# Altium PCB ADAS_ECU_MB_revA.PcbDoc (part 3 of 6)
Units mm, origin at the board's own origin, x right, y up, seen from the top; angles counter-clockwise.
Board outline 180 x 120 mm, 6 copper layers (Top Layer, Mid Layer 1, Mid Layer 2, Mid Layer 3, Mid Layer 4, Bottom Layer), stack 1.554 mm thick; 648 components, 505 nets, 4389 pads, 80 vias.
Unrouted connection lines stored in the file: 197.
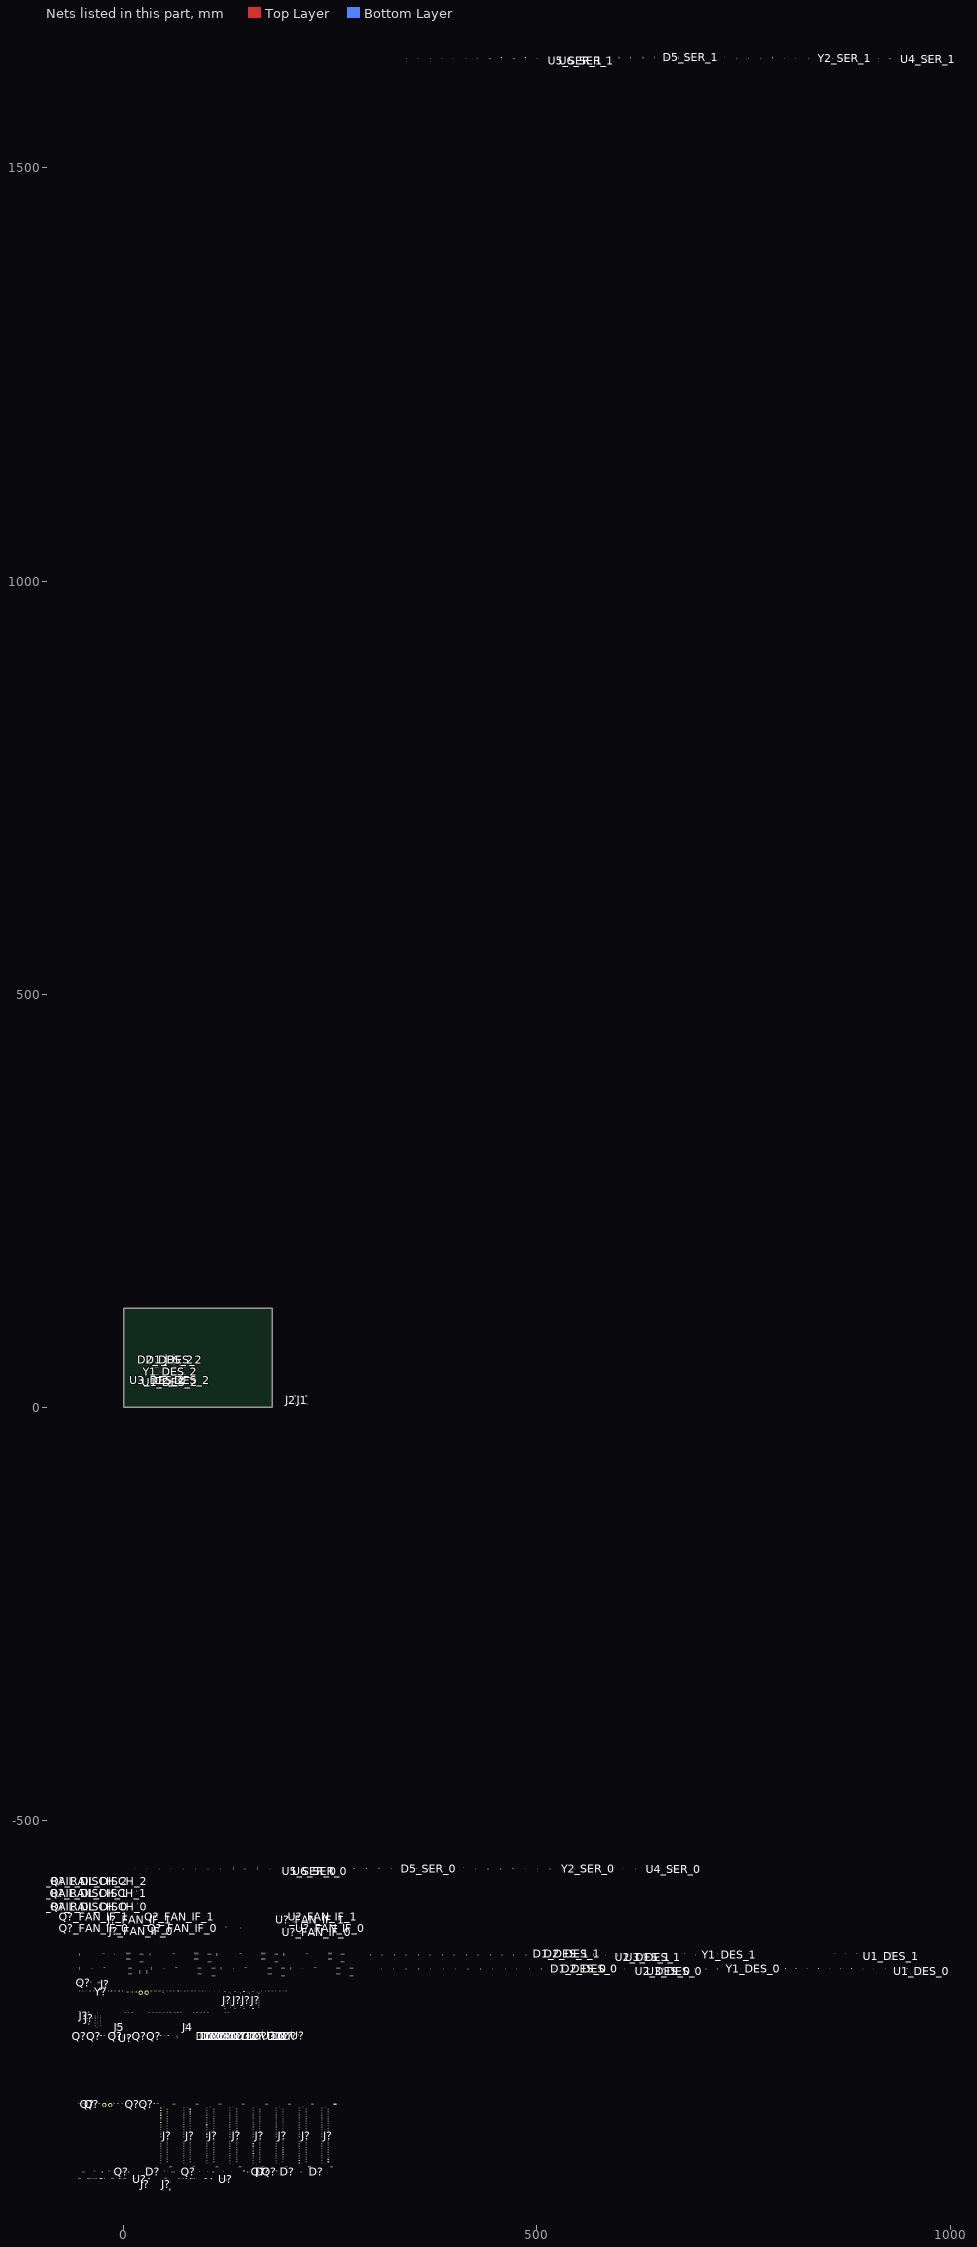
[diagram p3: the nets of this part, all layers, seen from the top]

## Footprints (in the part's own frame and the unit in brackets; to place one, negate y for a bottom-side part, rotate by r counter-clockwise, add the part's x,y. Pads: shape width x height; smd on the part's side, far side on the other; paste and mask are expansions set on the pad) (continued)
RESC1608X55X30LL15T15 [mm] "Chip Resistor, 2-Leads, Body 1.60x0.80mm, IPC High Density"
  rect 0.7x0.85 smd: 1(-0.625,0) 2(0.625,0)
  body extent -0.87,-0.48 0.87,0.48, height 0.55
RESC1608X55X30ML15T15 [mm] "Chip Resistor, 2-Leads, Body 1.60x0.80mm, IPC Low Density"
  rect 0.9x1.05 smd: 1(-0.725,0) 2(0.725,0)
  body extent -0.87,-0.48 0.87,0.48, height 0.55
RESC1609X55X30LL15T15 [mm] "Chip Resistor, 2-Leads, Body 1.75x0.95mm, IPC High Density"
  rect 0.75x0.85 smd: 1(-0.65,0) 2(0.65,0)
  body extent -0.87,-0.48 0.87,0.48, height 0.55
RESC1609X55X30ML15T15 [mm] "Chip Resistor, 2-Leads, Body 1.75x0.95mm, IPC Low Density"
  rect 1.15x1.05 smd: 1(-0.85,0) 2(0.85,0)
  body extent -0.87,-0.48 0.87,0.48, height 0.55
SOT65P242X110-6N [mm] "SOT23, 6-Leads, Body 1.70x2.42mm, Pitch 0.65mm, IPC Medium Density"
  rect 0.8x0.5 smd: 1(-1.125,0.65) 2(-1.125,0) 3(-1.125,-0.65) 4(1.125,-0.65) 5(1.125,0) 6(1.125,0.65)
  silkscreen extent -1.25,-0.9 0.2,1.62, body extent -0.6,-0.87 0.6,0.88, height 1.1
SOT-223_M [mm] "SOT223, 4-Leads, Body 6.5x3.5mm, Pitch 2.3mm, Lead Span 7mm, IPC Low Density"
  rect 2.7x1 smd: 1(-2.95,2.3) 2(-2.95,0) 3(-2.95,-2.3)
  rect 2.7x3.3 smd: 4(2.95,0)
  silkscreen extent -3.07,-3.35 1.3,3.47, body extent -1.85,-3.35 1.85,3.35, height 1.8
SWIT-35RASMT4BHNTRX_V [mm] "Jack, 5-Leads, Body 17x6mm"
  rect 2.2x2.1 smd: 1(-6.3,-4.05) 2(-4.4,4.05)
  rect 2.7x2.1 smd: 3(3,-4.05)
  rect 2x2.1 smd: 4(-7.1,4.05)
  rect 2.6x2.7 smd: 5(7.1,0.75)
  rect 0x0 hole 1.6 unplated: MH(-5.2,0) MH(1.8,0)
  silkscreen extent -8.7,-5.78 5.8,3, body extent -11.2,-3 5.8,3, height 5
TO-252_L [mm] "D-PAK, 4-Leads, Body 6.1x6.5mm, Pitch 2.28mm, Lead Span 9.7mm, IPC High Density"
  rect 1.8x0.9 smd: 1(-4.2,2.28) 3(-4.2,-2.28)
  rect 6.2x5.45 smd: 4(2,0)
  silkscreen extent -4.32,-3.3 -1.5,3.4, body extent -2.05,-3.3 4.15,3.3, height 2.4
WE-TPC_1038 [mm] "Power Inductor, SMD, 2-Leads, body 10x10mm"
  rect 4.6x1.8 smd: 1(0,4.5) 2(0,-4.5)
  silkscreen extent -5,-4.5 5,6.02, body extent -5,-5 5,5, height 3.8
WL-SBCD_0606 [mm] "SMT Bi-color Chip LED Diffuesed, body 1.5x1.6mm"
  rect 0.5x0.8 smd: 1(-0.45,0.8) 2(-0.45,-0.8) 3(0.45,-0.8) 4(0.45,0.8)
  silkscreen extent -0.07,1.48 0.08,1.62, body extent -0.75,-0.8 0.75,0.8, height 0.55

## Part data
C1_DES_0 C1_DES_1 C1_DES_2 C2_DES_0 C2_DES_1 C2_DES_2 C3_DES_0 C3_DES_1 C3_DES_2 C4_DES_0 C4_DES_1 C4_DES_2 C5_DES_0 C5_DES_1 C5_DES_2 C6_DES_0 C6_DES_1 C6_DES_2 C7_DES_0 C7_DES_1 C7_DES_2 C8_DES_0 C8_DES_1 C8_DES_2 C9_DES_0 C9_DES_1 C9_DES_2 C10_DES_0 C10_DES_1 C10_DES_2 C11_DES_0 C11_DES_1 C11_DES_2 C13_DES_0 C13_DES_1 C13_DES_2 C15_DES_0 C15_DES_1 C15_DES_2 C16_DES_0 C16_DES_1 C16_DES_2 C17_DES_0 C17_DES_1 C17_DES_2 C18_DES_0 C18_DES_1 C18_DES_2 C19_DES_0 C19_DES_1 C19_DES_2 C20_DES_0 C20_DES_1 C20_DES_2 C21_DES_0 C21_DES_1 C21_DES_2 C22_DES_0 C22_DES_1 C22_DES_2 C23_DES_0 C23_DES_1 C23_DES_2 C24_DES_0 C24_DES_1 C24_DES_2 C25_DES_0 C25_DES_1 C25_DES_2 C26_DES_0 C26_DES_1 C26_DES_2 C27_DES_0 C27_DES_1 C27_DES_2 C28_DES_0 C28_DES_1 C28_DES_2 C29_DES_0 C29_DES_1 C29_DES_2 C30_DES_0 C30_DES_1 C30_DES_2 C35_SER_0 C35_SER_1 C36_SER_0 C36_SER_1 C37_SER_0 C37_SER_1 C38_SER_0 C38_SER_1 C39_SER_0 C39_SER_1 C40_SER_0 C40_SER_1 C41_SER_0 C41_SER_1 C42_SER_0 C42_SER_1 C43_SER_0 C43_SER_1 C44_SER_0 C44_SER_1 C45_SER_0 C45_SER_1 C46_SER_0 C46_SER_1 C47_SER_0 C47_SER_1 C48_SER_0 C48_SER_1 C49_SER_0 C49_SER_1 C51_SER_0 C51_SER_1 C53_SER_0 C53_SER_1 C54_SER_0 C54_SER_1 C55_SER_0 C55_SER_1 C56_SER_0 C56_SER_1 C57_SER_0 C57_SER_1 C58_SER_0 C58_SER_1 C59_SER_0 C59_SER_1 C60_SER_0 C60_SER_1 C61_SER_0 C61_SER_1 C? C? C? C? C? C? C? C? C? C? C? C? C? C? C? C? C? C? C? C? C? C?: library part CMP-001-00058-1, "LARGE PADS, 0402 CAP, CHANGE COMMENT TO MATCH REAL P/N", Capacitor Type=Ceramic, Case/Package=0402, Max Operating Temperature=85°C, Min Operating Temperature=-55°C, Mounting Technology="Surface Mount", Pins=2, RoHS Compliant=Yes
C12_DES_0 C12_DES_1 C12_DES_2 C14_DES_0 C14_DES_1 C14_DES_2 C50_SER_0 C50_SER_1 C52_SER_0 C52_SER_1 C? C? C? C? C? C?: library part CMP-2006-02792-2, "Chip Multilayer Ceramic Capacitors for General Purpose, 0603, 10uF, X5R, 15%, 20%, 6.3V", Capacitance=10uF, Case Code (Imperial)=0603, Case Code (Metric)=1608, Dielectric=X5R, Max Operating Temperature=85°C, Min Operating Temperature=-55°C, Package Quantity=4000, Tolerance=20%, Voltage=6.3V, Case/Package=0603, Depth=0.8mm, Height=0.8mm, Lead Free="Lead Free", Length=1.6mm, Material=Ceramic, Mount="Surface Mount", Packaging="Tape and Reel", Radiation Hardening=No, REACH SVHC="No SVHC", Termination=SMD/SMT, Thickness=0.035inch, Voltage Rating=6.3V, Voltage Rating (DC)=6.3V, Width=0.031inch
C31_DES_0 C31_DES_1 C31_DES_2 C32_DES_0 C32_DES_1 C32_DES_2 C33_DES_0 C33_DES_1 C33_DES_2 C34_DES_0 C34_DES_1 C34_DES_2: library part CMP-2007-03222-3, "Chip Multilayer Ceramic Capacitors for General Purpose, 0805, 22uF, X5R, 15%, 20%, 25V", Capacitance=22uF, Case Code (Imperial)=0805, Case Code (Metric)=2012, Dielectric=X5R, Max Operating Temperature=85°C, Min Operating Temperature=-55°C, Package Quantity=3000, Resistor Type=Ceramic, Tolerance=20%, Voltage=25V, Case/Package=0805, Depth=1.25mm, Height=1.25mm, Lead Free="Lead Free", Length=2mm, Material=Ceramic, Mount="Surface Mount", Packaging="Tape and Reel", REACH SVHC="No SVHC", Termination=SMD/SMT, Thickness=0.057inch, Voltage Rating=25V, Voltage Rating (DC)=25V, Weight=0.000335oz, Width=1.25mm
C? C? C? C? C? C? C? C? C? C? C? C? C? C? C? C? C? C? C? C? C? C? C? C? C?_FAN_IF_0 C?_FAN_IF_0 C?_FAN_IF_1 C?_FAN_IF_1: library part CMP-2000-05393-2, "Multilayer Ceramic Capacitors 100nF ±10% 50V X7R SMD 0402", Capacitance=100nF, Case Code (Imperial)=0402, Case Code (Metric)=1005, Dielectric=X7R, Dielectric Material=Ceramic, Max Operating Temperature=125°C, Min Operating Temperature=-55°C, Package Quantity=1, Tolerance=10%, Voltage=50V, Case/Package=0402, Construction=Flat, Depth=0.5mm, Height=0.5mm, Lead Free="Lead Free", Length=1mm, Mount="Surface Mount", Packaging="Tape and Reel", Radiation Hardening=No, REACH SVHC="No SVHC", Resistor Type=Ceramic, RoHS Compliant=Yes, Series=C, Termination=SMD/SMT, Thickness=0.022inch, Voltage Rating=50V, Voltage Rating (DC)=50V, Weight=2.3E-05oz, Width=0.02inch
C? C?: library part CMP-2008-03310-2, "CAP CER 4.7PF 50V NP0 0402", Capacitance="4.7 pF", Manufacturer=Kemet, Package=C0402-BB, Temperature="-55°C to +125°C", Temperature Characteristic=C0G, Temperature Coefficient=15%, Temperature Range High=+125°C, Temperature Range Low=-55°C, Tolerance="0.25 pF", Voltage Rating="50 V", Automotive=No, Category=Cap, ComponentLink2Description=Datasheet, ComponentLink2URL=https://content.kemet.com/datasheets/KEM_C1002_X7R_SMD.pdf, Device Class L1="Passive Components", Device Class L2=Capacitors, Device Class L3="Ceramic Capacitors", Digikey Description="CAP CER 4.7PF 50V NP0 0402", Height=0.55mm, Ipc Land Pattern Name=CAPC10050X50, Lead Free=Yes, Manufacturer Part Number=C0402C479C5GACTU, Material=Ceramic, Mouser Description="Multilayer Ceramic Capacitors MLCC - SMD/SMT 50volts 4.7pF C0G .25pF", Octopart=https://octopart.com/c0402c479c5gactu-kemet-9144199, RoHS=TRUE
C?: library part CMP-2008-03945-2, "CAP CER 12PF 50V C0G/NP0 0402", Capacitance=12pF, Case Code (Imperial)=0402, Case Code (Metric)=1005, Dielectric=C0G, Max Operating Temperature=125°C, Min Operating Temperature=-55°C, Package Quantity=10000, Tolerance=2%, Voltage=50V, Case/Package=0402, Construction=Flat, Depth=0.5mm, Height=0.5mm, Lead Free="Lead Free", Length=1mm, Material=Ceramic, Mount="Surface Mount", Packaging="Tape and Reel", Radiation Hardening=No, REACH SVHC="No SVHC", Series=GRM, Termination=SMD/SMT, Thickness=0.022inch, Voltage Rating=50V, Voltage Rating (DC)=50V, Width=0.5mm
C? C? C? C?: library part CMP-2007-00321-1, Manufacturer=Kemet, Part Number=C0805C221K5RACTU
C? C? C? C?: library part CMP-13271-000002-1, "CAP CER 10UF 10V X5R 0402", Capacitance=10uF, Manufacturer=Samsung, Temperature="-55°C to +85°C", Temperature Characteristic=X5R, Temperature Coefficient=15%, Temperature Range High=+85°C, Temperature Range Low=-55°C, Tolerance=20%, Voltage Rating=10V, Automotive=No, Category=Cap, ComponentLink2Description=Datasheet, ComponentLink2URL=http://www.samsungsem.com/kr/support/product-search/mlcc/__icsFiles/afieldfile/2019/05/10/19-CL05A106MP5NUNC.pdf, Device Class L1="Passive Components", Device Class L2=Capacitors, Device Class L3="Ceramic Capacitors", Digikey Description="CAP CER 10UF 10V X5R 0402", Height=0.7mm, Ipc Land Pattern Name=CAPC10050X50, Lead Free=Yes, Manufacturer Part Number=CL05A106MP5NUNC, Material=Ceramic, Octopart=https://octopart.com/cl05a106mp5nunc-samsung-22457395, Package=CL05A106MP5NUNC, RoHS=TRUE
C? C?: library part CMP-2008-03137-2, Manufacturer=Kemet, Part Number=C0402C221K5RAC7867
C? C? C? C? C? C? C? C? C? C?: library part CMP-08246-006072-1, "Multilayer Ceramic Capacitors 220nF ±10% 10V X7R SMD 0402", Capacitance=220nF, Case Code (Imperial)=0402, Case Code (Metric)=1005, Dielectric=X7R, Dielectric Material=Ceramic, Max Operating Temperature=125°C, Min Operating Temperature=-55°C, Package Quantity=10000, Tolerance=10%, Voltage Rating=10V, Case/Package=0402, Construction=Flat, Depth=0.5mm, Height=0.5mm, Lead Free="Lead Free", Length=1mm, Mount="Surface Mount", Packaging="Tape and Reel", Radiation Hardening=No, REACH SVHC="No SVHC", Resistor Type=Ceramic, RoHS Compliant=Yes, Series=C, Termination=SMD/SMT, Thickness=0.022inch, Voltage Rating (DC)=10V, Weight=2.3E-05oz, Width=0.02inch
C?: library part CMP-1664-00002-2, "Tantalum Capacitor, 330 uF, +/- 20%, 2.5 V, -55 to 105 degC, 2-Pin Molded, RoHS, Tape and Reel", Capacitance="330 uF", Case/Package=1411, Max Operating Temperature="105 degC", Min Operating Temperature="-55 degC", Package Quantity=2000, ComponentLink1Description="Manufacturer URL", ComponentLink1URL=http://www.kemet.com/, ComponentLink2Description=Datasheet, ComponentLink2URL=http://capacitoredge.kemet.com/capedge2/DataSheet?pn=T520B337M2R5ATE045, DatasheetVersion=07/2016, Height="2.1 mm", Length="3.5 mm", Mount="Surface Mount", Mounting Technology="Surface Mount", PackageDescription="2-Pin Surface Mount Device, Body 3.5 x 2.8 mm", Packaging="Tape and Reel", PartNumber=T520B337M2R5ATE045, Radiation Hardening=No, RoHSCompliant=True, Width="2.8 mm"
D1_DES_0 D1_DES_1 D1_DES_2 D2_DES_0 D2_DES_1 D2_DES_2 D5_SER_0 D5_SER_1 D? D? D? D? D? D? D? D?: library part CMP-04989-000002-1, "4-CHANNEL LOW-CAPACITANCE SURGE", Ambient Temperature Range High=+125°C, Ambient Temperature Range Low=-40°C, Breakdown Voltage=5.5V, Capacitance=0.55pF, Clamping Voltage=11.5V, Manufacturer="Texas Instruments", Package=DQA0010A, Peak Pulse Current=5.5A, Peak Pulse Power=50W, Reverse Standoff Voltage=3.6V, Temperature="-40°C to +125°C", Automotive=No, Category=Diode, ComponentLink2Description=Datasheet, ComponentLink2URL=http://www.ti.com/lit/ds/symlink/esd204.pdf, Device Class L1="Circuit Protection", Device Class L2="TVS Diodes", Device Class L3=unset, Digikey Description="4-CHANNEL LOW-CAPACITANCE SURGE", Direction=Bidirectional, Height=0.55mm, Lead Free=Yes, Manufacturer Part Number=ESD204DQAR, Mouser Description="4-Channel Low-Capacitance Surge and ESD Protection Diode 10-USON -40 to 125", Number Of Channels=4, Octopart=https://octopart.com/esd204dqar-texas+instruments-89917476, RoHS=TRUE, Standoff Height=0mm, Temperature Range High=+125°C, Temperature Range Low=-40°C
D? D? D? D? D? D? D? D? D? D? D? D? D? D? D? D?: library part CMP-04989-000002-1, "4-CHANNEL LOW-CAPACITANCE SURGE", Ambient Temperature Range High=+125°C, Ambient Temperature Range Low=-40°C, Breakdown Voltage=5.5V, Capacitance=0.55pF, Clamping Voltage=11.5V, Manufacturer="Texas Instruments", Manufacturer Part Number=ESD204DQAR, Package=DQA0010A, Peak Pulse Current=5.5A, Peak Pulse Power=50W, Reverse Standoff Voltage=3.6V, Temperature="-40°C to +125°C", Automotive=No, Category=Diode, ComponentLink2Description=Datasheet, ComponentLink2URL=http://www.ti.com/lit/ds/symlink/esd204.pdf, Device Class L1="Circuit Protection", Device Class L2="TVS Diodes", Device Class L3=unset, Digikey Description="4-CHANNEL LOW-CAPACITANCE SURGE", Direction=Bidirectional, Height=0.55mm, Lead Free=Yes, Mouser Description="4-Channel Low-Capacitance Surge and ESD Protection Diode 10-USON -40 to 125", Number Of Channels=4, Octopart=https://octopart.com/esd204dqar-texas+instruments-89917476, RoHS=TRUE, Standoff Height=0mm, Temperature Range High=+125°C, Temperature Range Low=-40°C
D?: library part CMP-1055-00557-1, "Dual Series Cathode Schottky Barrier Diodes, 3-Pin SOT-323, Pb-Free, Tape and Reel", Manufacturer="On Semiconductor", ComponentLink1Description="Manufacturer URL", ComponentLink1URL=http://www.onsemi.com/, ComponentLink2Description=Datasheet, ComponentLink2URL=http://www.onsemi.cn/pub_link/Collateral/BAT54CWT1-D.PDF, ComponentLink3Description="Package Specification", ComponentLink3URL=http://www.onsemi.com/pub_link/Collateral/419-04.PDF, Configuration="Common Cathode", DatasheetVersion="Rev. 7", IFSM Max (A)=0.6, Mounting Technology="Surface Mount", PackageDescription="3-Pin Small Outline Transistor, Body 2 x 1.25 mm, Pitch 0.65 mm", PackageReference=SOT-323-3-419-04, PackageVersion="Rev. N, 11/2008", Packing="Tape and Reel", PartNumber=BAT54CWT1G, RoHS=TRUE, trr Max (ns)=5
D?: library part CMP-004-00040-2, "Led, Red/Grn, 180Mcd/230Mcd, 624Nm/525Nm Rohs Compliant: Yes", Component Type=Standard, Design Item ID=CMP-004-00034-2, Pins=4, Source=rgled.SchLib
F1_DES_0 F1_DES_1 F1_DES_2 F2_DES_0 F2_DES_1 F2_DES_2 F3_DES_0 F3_DES_1 F3_DES_2 F4_DES_0 F4_DES_1 F4_DES_2 F?_FAN_IF_0 F?_FAN_IF_1: library part CMP-08606-000071-1, "PTC RESET FUSE 60V 500MA 2920", Case Code (Imperial)=2920, Case Code (Metric)=7351, Current Rating=10A, Hold Current=500mA, Max Operating Temperature=85°C, Max Voltage Rating (DC)=60V, Min Operating Temperature=-40°C, Package Quantity=1500, Power Dissipation=1.5W, Resistance=1.4R, Trip Current=1A, Approvals=cULus, Case/Package=2920, Height=1.25mm, Lead Free="Lead Free", Length=7.98mm, Max Current Rating=10A, Operating Supply Voltage=60V, Packaging="Tape and Reel", REACH SVHC="No SVHC", RoHS Compliant=Yes, Series=2920L, Terminal Material=Copper, Termination=SMD/SMT, Time to Trip=4s, Voltage Rating=60V, Voltage Rating (DC)=60V, Width=5.44mm, Working Voltage=60V
FB? FB? FB? FB? FB? FB? FB? FB?: library part CMP-0686-00252-4, "Chip Ferrite Bead, 0402, 600Ω @ 100MHz, 0.23Ω, 25%, 900mA", Case Code (Imperial)=0402, Case Code (Metric)=1005, Current Rating=900mA, DC Resistance (DCR)=230mR, Max Operating Temperature=125°C, Min Operating Temperature=-55°C, Package Quantity=10000, Test Frequency=100MHz, Tolerance=25%, Case/Package=0402, Height=0.5mm, Impedance=600R, Lead Free="Lead Free", Length=1mm, Material=Steel, Max Current Rating=900mA, Max DC Current=900mA, Number of Circuits=1, Number of Lines=1, Number of Pins=2, Packaging="Tape and Reel", Termination=SMD/SMT, Width=0.5mm
J1 J2 J3: library part CMP-002-00085-1, "Connector Mini-FAKRA Plug 0Hz to 9GHz 50Ohm Solder Straight Through Hole Gold"
J4 J5: library part CMP-002-00054-1, "RF F Connector, Male, Board Mount, Solder Terminal, Plug", Connector Type="RF F CONNECTOR", Mounting Technology=Board, RoHS Compliant=Yes
J? J? J? J? J? J? J? J?: library part CMP-03356-000001-1, "DDR4 SODIMM 260P 9.2H STD", Current Rating=0.5A, Manufacturer="TE Connectivity", Package=0, Temperature="-55°C to +85°C", Temperature Range High=+85°C, Temperature Range Low=-55°C, Voltage Rating=25V, Automotive=No, Category=Conn, ComponentLink2Description=Datasheet, ComponentLink2URL=https://www.te.com/commerce/DocumentDelivery/DDEController?Action=showdoc&DocId=Specification+Or+Standard%7F108-115122%7FA1%7Fpdf%7FEnglish%7FENG_SS_108-115122_A1.pdf%7F2309413-1, Conn Orientation=Horizontal, Contact Material=Gold,Nickel, Device Class L1=Connectors, Device Class L2="Memory Connectors", Device Class L3=unset, Digikey Description="DDR4 SODIMM 260P 9.2H STD", Footprint Url=https://www.te.com/commerce/DocumentDelivery/DDEController?Action=showdoc&DocId=Customer+Drawing%7F2309413%7F4%7Fpdf%7FEnglish%7FENG_CD_2309413_4.pdf%7F2309413-1, Height=18.8mm, Is Female=yes, Lead Free=Yes, Manufacturer Part Number=2309413-1, Memory Type=SDRAM,DDR, Mouser Description="Conn DDR4 DIMM Socket SKT 260 POS 0.5mm Solder RA SMD T/R", Number of Contacts=260, Octopart=https://octopart.com/2309413-1-te+connectivity-84799194, Pitch=0.5mm, RoHS=TRUE
J?: library part CMP-02766-001428-1, "CONN HEADER VERT 2POS 2.54MM", Color=Black, Current Rating=7.6A, Max Operating Temperature=125°C, Max Voltage Rating (AC)=550V, Min Operating Temperature=-55°C, Package Quantity=1, Connector Type="Male Pin", Contact Material=Bronze, Contact Mating Length=0.23inch, Contact Plating=Gold, Contact Type="Male Pin", Depth=2.54mm, Gender=Male, Housing Color=Black, Housing Material=Polyester, Lead Free="Lead Free", Length=5.08mm, Max Current Rating=7.6A, Mount="Through Hole", Number of Contacts=2, Number of Positions=2, Number of Rows=1, Orientation=Straight, Packaging=Bulk, Pitch=2.54mm, Radiation Hardening=No, REACH SVHC="No SVHC", RoHS Compliant=Yes, Series=TSW, Termination=Solder, Voltage Rating=550V, Width=2.54mm
J?: library part CMP-1772-00001-1, "Female 3.5 mm Phone Jack, 5 Position, Height 5 mm, RoHS, Tape and Reel", Current Rating="50 mA", Package Quantity=3000, Voltage Rating (DC)="12 V", ComponentLink1Description="Manufacturer URL", ComponentLink1URL=http://www.switchcraft.com/, ComponentLink2Description=Datasheet, ComponentLink2URL=http://www.switchcraft.com/Drawings/35rasmt4bhntrx_cd.pdf, Contact Material=Silver, Contact Plating=Silver, DatasheetVersion="Rev. C, 07/2014", Mount="Through Hole", PackageDescription="Female 3.5 mm Phone Jack, 5 Position, Height 5 mm", PackageReference=35RASMT4BHNTRX, Packaging="Tape and Reel", RoHSCompliant=true
J?: library part CMP-17439-000359-1, "CONN HEADER VERT 7POS 2MM", Color=Natural, Contact Resistance=10mR, Current Rating=2A, Insulation Resistance=1GR, Package Quantity=500, Test Voltage=800V, Connector Type="Male Pin", Contact Material=Bronze, Contact Mating Length=0.13inch, Contact Plating=Tin, Contact Type="Male Pin", Fastening Type=Detent, Gender=Male, Housing Color=Natural, Housing Material=Nylon, Lead Free="Contains Lead", Mount="Through Hole", Number of Contacts=7, Number of Positions=7, Number of Rows=1, Orientation=Vertical, Packaging=Bulk, Pitch=0.079inch, Series=PH, Termination=Press-Fit
J? J? J? J?: library part CMP-03365-000001-1, "CONN EDGE DUAL FMALE 67POS 0.020", Current Rating=0.5A, Manufacturer=TE, Temperature="-40°C to +80°C", Temperature Range High=+80°C, Temperature Range Low=-40°C, Voltage Rating=50V, Automotive=No, Category=Conn, ComponentLink2Description=Datasheet, ComponentLink2URL=http://www.te.com/commerce/DocumentDelivery/DDEController?Action=showdoc&DocId=Specification+Or+Standard%7F114-115006%7FB%7Fpdf%7FEnglish%7FENG_SS_114-115006_B_114-115006_REV_B.pdf%7F1-2199230-6, Conn Gender=Female, Conn Orientation="Right Angle", Contact Material=Gold,Tin, Device Class L1=Connectors, Device Class L2="Card Edge Connectors", Device Class L3=unset, Digikey Description="CONN EDGE DUAL FMALE 67POS 0.020", Footprint Url=http://www.te.com/commerce/DocumentDelivery/DDEController?Action=showdoc&DocId=Customer+Drawing%7F2199230%7FB2%7Fpdf%7FEnglish%7FENG_CD_2199230_B2.pdf%7F1-2199230-6, Height=4.2mm, Is Female=yes, Lead Free=Yes, Manufacturer Part Number=1-2199230-6, Number of Contacts=67, Number of Rows=2, Octopart=https://octopart.com/1-2199230-6-te+connectivity-34969376, Package=1-2199230-6, Pitch=0.5mm, RoHS=TRUE
J?: library part CMP-2000-05829-1, "Micro-USB B Receptacle, Vertical, -30 to 85 degC, 5-Pin SMD, RoHS, Tape and Reel", Color=Black, Current Rating=1.8A, Flammability Rating=UL94V-0, Manufacturer=Molex, Package Description="5-Pin Surface Mount Device, Pitch 0.65 mm", Package Version="Rev. C, 11/2015", Voltage - Max=30V, Voltage Rating=30VAC, Brand=Molex, Connector Type=MicroUSBTypeBReceptacle, Contact Material=CopperAlloy, Contact Plating=Gold, Datasheet URL=http://www.molex.com/webdocs/datasheets/pdf/en-us/1051330001_IO_CONNECTORS.pdf, Datasheet Version=03/2016, Factory Pack Quantity=6000, Gender=Receptacle, Manufacturer URL=http://www.molex.com/, Mounting Angle=Vertical, Mounting Style=SMD/SMT, Mounting Technology=SurfaceMount, Number of Ports=1, Package Reference=105133-0001, Package URL=http://www.molex.com/pdm_docs/sd/1051330001_sd.pdf, Packaging=Reel, PartNumber=105133-0001, Product=MicroUSBTypeBConnectors, Product Category=USBConnectors, RoHS=Details, Series=105133, Standard=USB, Termination Style=SolderTail
J?: library part CMP-02766-001776-1, "CONN HEADER VERT 4POS 2.54MM", Contact Material=Bronze, Contact Plating=Gold, Gender=Male, Mount="Through Hole", Number of Contacts=4, Number of Rows=1, Packaging=Bulk, Pitch=2.54mm, Radiation Hardening=No, Reach SVHC Compliant=Yes, RoHS Compliant=Yes, Series=HTSW, Termination="Through Hole"
J?: library part CMP-04768-000010-1, "HDMI REC.VERTICAL SMT TYPE W/HEI", RoHS Compliant=Yes
J?: library part CMP-002-00077-1, "Board Stacking Connector", Connector Type="BOARD STACKING CONNECTOR", RoHS Compliant=Yes
J?_FAN_IF_0 J?_FAN_IF_1: library part CMP-04776-000290-2, "CONN HEADER VERT 4POS 2.54MM", Ambient Temperature Range High=105°C, Current Rating=500mA, Housing Color=Beige, Manufacturer Lifecycle Status=ACTIVE, Max Operating Temperature=75°C, Min Operating Temperature=0°C, Voltage Rating=250V, Contact Material="Brass, Copper", Contact Plating=Tin, Country of Origin=HK, Depth=5.84mm, Gender=Male, Glow Wire Compliant=Non-compliant, Halogen Free="Low Halogen", Height=7.7mm, Housing Material=Nylon, Lead Pitch=2.54mm, Length=10.2mm, Lifecycle Status=Production, Mount="Through Hole", NexarPartId=854935, Number of Circuits=4, Number of Contacts=4, Number of Pins=4, Number of Positions=4, Number of Rows=1, Orientation=Vertical, Packaging=Bulk, Pitch=2.54mm, Plating=Copper, Radiation Hardening=No, REACH SVHC=Unknown, RoHS=Compliant, Schedule B="8536694040, 8536694040", Termination="Through Hole", Voltage Rating (DC)=250V
L1_DES_0 L1_DES_1 L1_DES_2 L4_DES_0 L4_DES_1 L4_DES_2 L7_DES_0 L7_DES_1 L7_DES_2 L10_DES_0 L10_DES_1 L10_DES_2: library part CMP-0227-00094-3, Ambient Temperature Range High=95°C, Ambient Temperature Range Low=-40°C, Case/Package=Nonstandard, Current Rating=1.2A, DC Resistance (DCR)=255mΩ, Inductance=100µH, Inductance Tolerance=30%, Max Operating Temperature=125°C, Self Resonant Frequency=6MHz, Test Frequency=100kHz, Composition=Wirewound, Core Material=Ferrite, Depth=10mm, Height=3.8mm, Height - Seated (Max)=4.0894mm, Length=10mm, Max DC Current=1.2A, Min Operating Temperature=-40°C, Mount="Surface Mount", NexarPartId=8917123, Number of Pins=2, Packaging="Cut Tape (CT)", REACH SVHC=Unknown, Resistance=255mΩ, RMS Current (Irms)=1.2A, RoHS=Compliant, Saturation Current=1.2A, Shielding=Shielded, Termination=SMD/SMT, Tolerance=30%, Weight=1.273007g, Width=10mm
L2_DES_0 L2_DES_1 L2_DES_2 L5_DES_0 L5_DES_1 L5_DES_2 L8_DES_0 L8_DES_1 L8_DES_2 L11_DES_0 L11_DES_1 L11_DES_2: library part CMP-11268-000041-1, "NOT COILCRAFT - ACTUAL P# --> ADL32VHC-220M /  - Power Injection Chokes for PoC", Ambient Temperature Range High=+125°C, Ambient Temperature Range Low=-40°C, Inductance=22uH, Manufacturer=coilcraft, Manufacturer Part Number=1210POC-223MRC, Package=1210POC, Rms Current=700mA, Saturation Current=720mA, Self Resonant Frequency=70MHz, Series Resistance=0.88Ω, Test Frequency=100kHz, Tolerance=20%, Automotive=Yes, Automotive Grade="Grade 1", Category=Ind, ComponentLink2Description=Datasheet, ComponentLink2URL=https://drive.google.com/open?id=15FlOq8Y4YbRFohfA_cJ40jgnqs8va2Mh, Core Material=Ferrite, Device Class L1="Passive Components", Device Class L2=Inductors, Device Class L3="Fixed Inductors", Height=3mm, Lead Free=Yes, Octopart=https://octopart.com/1210poc-223mrc-coilcraft-103207315, RoHS=TRUE
L3_DES_0 L3_DES_1 L3_DES_2 L6_DES_0 L6_DES_1 L6_DES_2 L9_DES_0 L9_DES_1 L9_DES_2 L12_DES_0 L12_DES_1 L12_DES_2: library part CMP-11268-000007-1, "Fixed Inductors PFL1609 Low Profile 0.56 uH 20 % 1.4 A", Ambient Temperature Range High=+105°C, Ambient Temperature Range Low=-40°C, Inductance=0.56uH, Manufacturer=coilcraft, Package=PFL1609, Rms Current=1100mA, Saturation Current=710mA, Self Resonant Frequency=600MHz, Series Resistance=130mΩ, Test Frequency=7.9MHz, Tolerance=20%, Automotive=Yes, Automotive Grade="Grade 1", Category=Ind, ComponentLink2Description=Datasheet, ComponentLink2URL=https://www.coilcraft.com/pdfs/pfl1609.pdf, Composition=Wirewound, Core Material=Composite, Device Class L1="Passive Components", Device Class L2=Inductors, Device Class L3="Fixed Inductors", Height=0.95mm, Lead Free=Yes, Manufacturer Part Number=PFL1609-561MEW, Mouser Description="Fixed Inductors PFL1609 Low Profile 0.56 uH 20 % 1.4 A", Octopart=https://octopart.com/pfl1609-561mew-coilcraft-20329171, RoHS=TRUE, Shielding=true
MP? MP? MP? MP?: library part CMP-03913-59774857-1, "9774025243R Spacer Material: Steel, Tin-Plated Mounting: SMT Series: WA-SMST Thread D: M2", Max Operating Temperature=150°C, Min Operating Temperature=-55°C, Height=2.5mm, Length=2.5mm, Material=Steel, NexarPartId=59774857, Outside Diameter=4.3434mm, Packaging="Tape and Reel", Plating=Tin, REACH SVHC=Unknown, RoHS=Compliant, Threaded/Unthreaded=Threaded
Q? Q? Q? Q? Q? Q? Q? Q? Q? Q? Q? Q? Q? Q?_FAN_IF_0 Q?_FAN_IF_0 Q?_FAN_IF_1 Q?_FAN_IF_1: library part CMP-2000-05968-1, "N-Channel Enhancement Mode Mosfet, 50 V, 200 mA, -55 to 150 degC, 6-Pin SOT-323, RoHS, Tape and Reel", Id - Continuous Drain Current=200mA, Manufacturer=DiodesIncorporated, Maximum Operating Temperature=+150C, Minimum Operating Temperature=-55C, Package / Case=SOT-323-3, Package Description="3-Pin Small Outline Transistor, Body 2 x 1.25 mm, Pitch 0.65 mm", Package Reference=SOT323, Pd - Power Dissipation=200mW, Rds On - Drain-Source Resistance=1.4Ohms, Vds - Drain-Source Breakdown Voltage=75V, Vgs - Gate-Source Voltage=20V, Brand=DiodesIncorporated, Channel Mode=Enhancement, Configuration=Single, Datasheet URL=http://www.diodes.com/_files/datasheets/ds30206.pdf, Datasheet Version="Rev. 11-2, 09/2013", Factory Pack Quantity=3000, Forward Transconductance - Min=0.1S, Height=1mm, Length=2.2mm, Manufacturer URL=http://www.diodes.com/, Mounting Style=SMD/SMT, Mounting Technology=SurfaceMount, Number Of Channels=1Channel, Packaging=Reel, Product=MOSFETSmallSignal, Product Category=MOSFET, RoHS=True, Series=BSS138, Technology=Si, Transistor Polarity=N-Channel, Transistor Type=1N-Channel, Type=EnhancementModeFieldEffectTransistor, Typical Turn-Off Delay Time=20ns, Typical Turn-On Delay Time=20ns, Unit Weight=0.000212oz, Width=1.35mm
Q? Q? Q?_RAIL_DISCH_0 Q?_RAIL_DISCH_0 Q?_RAIL_DISCH_1 Q?_RAIL_DISCH_1 Q?_RAIL_DISCH_2 Q?_RAIL_DISCH_2: library part CMP-35916-000009-1, "MOSFET 2N-CH 60V 0.3A", Continuous Drain Current (ID)=300mA, Drain to Source Voltage (Vdss)=60V, Input Capacitance=40pF, Max Power Dissipation=285mW, FET Type="2 N-Channel", Mount="Surface Mount", Packaging="Tape and Reel", Rds On Max=1.5R
R1_DES_0 R1_DES_1 R1_DES_2 R2_DES_0 R2_DES_1 R2_DES_2 R3_DES_0 R3_DES_1 R3_DES_2 R4_DES_0 R4_DES_1 R4_DES_2 R5_DES_0 R5_DES_1 R5_DES_2 R6_DES_0 R6_DES_1 R6_DES_2 R7_DES_0 R7_DES_1 R7_DES_2 R8_DES_0 R8_DES_1 R8_DES_2 R9_DES_0 R9_DES_1 R9_DES_2 R10_DES_0 R10_DES_1 R10_DES_2 R11_DES_0 R11_DES_1 R11_DES_2 R12_DES_0 R12_DES_1 R12_DES_2 R13_DES_0 R13_DES_1 R13_DES_2 R14_DES_0 R14_DES_1 R14_DES_2 R15_DES_0 R15_DES_1 R15_DES_2 R16_SER_0 R16_SER_1 R17_SER_0 R17_SER_1 R20_SER_0 R20_SER_1 R21_SER_0 R21_SER_1 R22_SER_0 R22_SER_1 R23_SER_0 R23_SER_1 R24_SER_0 R24_SER_1 R25_SER_0 R25_SER_1 R26_SER_0 R26_SER_1 R27_SER_0 R27_SER_1 R28_SER_0 R28_SER_1 R29_SER_0 R29_SER_1: library part CMP-009-00002-14, "Resistor"
R18_SER_0 R18_SER_1 R19_SER_0 R19_SER_1 R? R? R? R? R? R? R? R? R? R? R? R? R? R? R? R? R? R? R? R? R? R? R? R? R? R? R? R? R? R? R? R? R? R? R? R? R? R? R?_FAN_IF_0 R?_FAN_IF_0 R?_FAN_IF_0 R?_FAN_IF_1 R?_FAN_IF_1 R?_FAN_IF_1: library part CMP-009-00118-2, "READ THE NAME", Component Type=Standard, Design Item ID=CMP-009-00206-2, Pins=2, Source=0402jump.SchLib
R? R? R? R? R? R? R? R?: library part CMP-2002-00965-2, "RES SMD 499 OHM 1% 1/10W 0402", Case Code (Imperial)=0402, Case Code (Metric)=1005, Max Operating Temperature=155°C, Max Power Dissipation=100mW, Min Operating Temperature=-55°C, Package Quantity=1, Resistance=499R, Resistance Tolerance=1%, Resistor Type="Thick Film", Temperature Coefficient=100ppm/°C, Voltage Rating=50V, Case/Package=0402, Construction=Rectangular, Contact Plating=Tin, Depth=0.5mm, Features="Automotive AEC-Q200", Height=0.35mm, Lead Free="Lead Free", Length=1mm, Military Standard=Not, Mount="Surface Mount", Number of Terminations=2, Packaging="Tape and Reel", Power Rating=100mW, REACH SVHC="No SVHC", RoHS Compliant=Yes, Series=ERJ, Size Code=0402, Technology="THICK FILM", Termination=SMD/SMT, Tolerance=1%, Voltage Rating (DC)=50V, Width=0.02inch
R? R? R? R? R? R? R? R? R? R? R? R? R? R? R? R? R? R? R? R? R? R? R? R?_FAN_IF_0 R?_FAN_IF_0 R?_FAN_IF_0 R?_FAN_IF_0 R?_FAN_IF_1 R?_FAN_IF_1 R?_FAN_IF_1 R?_FAN_IF_1: library part CMP-1012-00623-3, "Chip Resistor, 10 KOhm, +/- 1%, 0.1 W, -55 to 155 degC, 0603 (1608 Metric), RoHS, Tape and Reel", Case Code (Imperial)=0603, Case Code (Metric)=1608, Manufacturer=Panasonic, Max Operating Temperature=155degC, Max Power Dissipation=100mW, Min Operating Temperature=-55degC, Package Description="2-Pin Surface Mount Device, Body 1.6 x 0.85 mm", Package Quantity=1, Package Reference=603, Resistance=10KOhm, Temperature Coefficient=100ppm\/degreesC, Tolerance=1%, Voltage Rating=75V, Case\/Package=0603, Composition=ThickFilm, Contact Plating=Tin, Datasheet URL=https://industrial.panasonic.com/cdbs/www-data/pdf/RDA0000/AOA0000C304.pdf, Datasheet Version=02/2017, Depth=0.8mm, Height=0.45mm, Lead Free=LeadFree, Length=1.6mm, Manufacturer URL=http://www.panasonic.com/, Military Standard=Not, Mount=SurfaceMount, Mounting Technology=SurfaceMount, Number of Pins=2, Number of Terminations=2, Packaging=TapeandReel, Power Rating=100mW, Radiation Hardening=No, REACH SVHC=NoSVHC, RoHSCompliant=true, Termination=SMD/SMT, Voltage Rating (DC)=75V, Width=0.031inch
R? R? R? R? R? R? R? R? R? R? R? R? R? R? R? R? R?_FAN_IF_0 R?_FAN_IF_0 R?_FAN_IF_1 R?_FAN_IF_1 R?_RAIL_DISCH_0 R?_RAIL_DISCH_1 R?_RAIL_DISCH_2: library part CMP-2000-00182-1, Manufacturer=Panasonic, Part Number=ERJ-3EKF1003V
R? R? R? R? R? R? R? R? R? R? R? R?_FAN_IF_0 R?_FAN_IF_0 R?_FAN_IF_0 R?_FAN_IF_1 R?_FAN_IF_1 R?_FAN_IF_1: library part CMP-2000-00180-1, Manufacturer=Panasonic, Part Number=ERJ-3EKF1001V
R?: library part CMP-1012-00758-2, Manufacturer=Panasonic, Part Number=ERJ-3EKF1623V
R? R?: library part CMP-2000-00389-1, "MODIFIED P/N", Manufacturer=Panasonic, Part Number=ERJ3EKF2701V
R? R? R? R? R? R? R?: library part CMP-1011-00001-2, Manufacturer="Yageo / Phycomp", Part Number=RC0402JR-070RL
R? R?: library part CMP-1012-00798-1, "360K 0.1W 1% 0603 (1608 Metric)  SMD", Case-EIA=0603, Case-Metric=1608, Power="0.1 W", Tolerance="1 %", Technology=SMT
R? R? R? R? R?: library part CMP-2100-03667-1, "Chip Resistor, 0 Ohm, +/- 5%, 0.1 W, -55 to 155 degC, 0603 (1608 Metric), RoHS, Tape and Reel", Case Code (Imperial)=0603, Case Code (Metric)=1608, Manufacturer=Yageo, Max Operating Temperature=155degC, Min Operating Temperature=-55degC, Package Description="2-Pin Surface Mount Device, Body 1.6 x 0.8 mm", Package Quantity=5000, Power Rating=100mW, Resistance=0mOhm, Temperature Coefficient=200ppm/degreesC, Tolerance=5%, Voltage Rating=50V, Case/Package=0603, Composition=ThickFilm, Contact Plating=Tin, Datasheet URL=http://www.yageo.com/NewPortal/yageodocoutput?fileName=/pdf/R-Chip/PYu-RC_Group_51_RoHS_L_5.pdf, Datasheet Version="Rev. 5, 10/2016", Depth=0.8mm, Height=0.45mm, Lead Free=LeadFree, Length=1.6mm, Manufacturer URL=http://www.yageo.com/, Military Standard=Not, Number of Pins=2, Package Reference=0603, Packaging=TapeandReel, Radiation Hardening=No, REACH SVHC=NoSVHC, RoHSCompliant=true, Termination=SMD/SMT, Voltage Rating (DC)=50V, Width=0.8mm
R?: library part CMP-2000-00433-2, "RES SMD 32.4K OHM 1% 1/10W 0603", Case Code (Imperial)=0603, Case Code (Metric)=1608, Max Operating Temperature=155°C, Max Power Dissipation=100mW, Min Operating Temperature=-55°C, Package Quantity=1, Resistance=32.4kR, Resistance Tolerance=1%, Resistor Type="Thick Film", Temperature Coefficient=100ppm/°C, Voltage Rating=75V, Voltage Rating (DC)=50V, Case/Package=0603, Construction=Rectangular, Contact Plating=Tin, Depth=0.8mm, Features="Automotive AEC-Q200", Height=0.45mm, Lead Free="Lead Free", Length=1.6mm, Military Standard=Not, Mount="Surface Mount", Number of Terminations=2, Packaging="Tape and Reel", Power Rating=100mW, Radiation Hardening=No, RoHS Compliant=Yes, Series=ERJ, Technology="THICK FILM", Termination=SMD/SMT, Tolerance=1%, Width=0.8mm
R?: library part CMP-2000-00443-2, "RES SMD 33 OHM 1% 1/10W 0603", Case Code (Imperial)=0603, Case Code (Metric)=1608, Max Operating Temperature=155°C, Max Power Dissipation=100mW, Min Operating Temperature=-55°C, Package Quantity=1, Resistance=33R, Resistance Tolerance=1%, Resistor Type="Thick Film", Temperature Coefficient=100ppm/°C, Voltage Rating=75V, Case/Package=0603, Construction=Rectangular, Contact Plating=Tin, Depth=0.8mm, Features="Automotive AEC-Q200", Height=0.022inch, Lead Free="Lead Free", Length=1.6mm, Military Standard=Not, Mount="Surface Mount", Number of Pins=2, Number of Terminations=2, Packaging="Tape and Reel", Power Rating=100mW, Radiation Hardening=No, REACH SVHC="No SVHC", RoHS Compliant=Yes, Series=ERJ, Size Code=0603, Termination=SMD/SMT, Tolerance=1%, Voltage Rating (DC)=75V, Width=0.031inch
R? R?: library part CMP-2000-00213-2, "Chip Resistor, 120 Ohm, +/- 1%, 0.1 W, -55 to 155 degC, 0603 (1608 Metric), RoHS, Tape and Reel", Case Code (Imperial)=0603, Case Code (Metric)=1608, Manufacturer=Panasonic, Max Operating Temperature=155degC, Max Power Dissipation=100mW, Min Operating Temperature=-55degC, Package Description="2-Pin Surface Mount Device, Body 1.6 x 0.85 mm", Package Quantity=1, Resistance=120Ohm, Temperature Coefficient=100ppm/degreesC, Tolerance=1%, Voltage Rating=75V, Case/Package=0603, Composition=ThickFilm, Contact Plating=Tin, Datasheet URL=https://industrial.panasonic.com/cdbs/www-data/pdf/RDA0000/AOA0000C283.pdf, Datasheet Version=42095.0, Depth=0.8mm, Height=0.022inch, Lead Free=LeadFree, Length=1.6mm, Manufacturer URL=http://www.panasonic.com/, Military Standard=Not, Mount=SurfaceMount, Number of Pins=2, Number of Terminations=2, Package Reference=0603, Package URL=http://www.st.com/st-web-ui/static/active/en/resource/technical/document/datasheet/CD00001320.pdf, Packaging=TapeandReel, Power Rating=100mW, Radiation Hardening=No, REACH SVHC=NoSVHC, RoHSCompliant=true, Termination=SMD/SMT, Voltage Rating (DC)=75V, Width=0.031inch
R?_RAIL_DISCH_0 R?_RAIL_DISCH_1 R?_RAIL_DISCH_2: library part CMP-2000-00850-1, Manufacturer=Panasonic, Part Number=ERJ-3RQF5R6V
TP? TP? TP? TP? TP? TP? TP? TP? TP? TP? TP? TP? TP?: library part CMP-00025-2, "Test Point .6mm"
U1_DES_0 U1_DES_1 U1_DES_2: library part CMP-015-00011-2, "Quad Tunneling GMSL2/1 to CSI-2 Deserializer"
U2_DES_0 U2_DES_1 U2_DES_2 U5_SER_0 U5_SER_1 U?: library part CMP-0244-00308-1, "Fixed Low Drop Positive Voltage Regulator, 1.8V, 4-Pin SOT-223, Tape and Reel", ComponentLink1Description="Manufacturer URL", ComponentLink1URL=http://www.st.com, ComponentLink2Description=Datasheet, ComponentLink2URL=http://www.st.com/internet/com/TECHNICAL_RESOURCES/TECHNICAL_LITERATURE/DATASHEET/CD00000544.pdf, DatasheetVersion=1/11/2011, PackageDescription="4-Pin SOT-223 Package, 6.5 x 3.5 mm Body, 2.3 mm Pitch, 7 mm Lead Span", PackageReference=SOT-223, PackageVersion=2010
U3_DES_0 U3_DES_1 U3_DES_2 U6_SER_0 U6_SER_1: library part CMP-0244-00318-1, "Fixed Low Drop Positive Voltage Regulator, 1.2V, 4-Pin SOT-223, Tape and Reel", ComponentLink1Description="Manufacturer URL", ComponentLink1URL=http://www.st.com, ComponentLink2Description=Datasheet, ComponentLink2URL=http://www.st.com/internet/com/TECHNICAL_RESOURCES/TECHNICAL_LITERATURE/DATASHEET/CD00000544.pdf, DatasheetVersion=1/11/2011, PackageDescription="4-Pin SOT-223 Package, 6.5 x 3.5 mm Body, 2.3 mm Pitch, 7 mm Lead Span", PackageReference=SOT-223, PackageVersion=2010
U4_SER_0 U4_SER_1: library part CMP-015-00012-1, "3Gbps Serializer TQFN-32 Serializers / Deserializers ROHS"
U? U?: library part CMP-0859-00290-4, "IC BUFF/DVR NON-INVERT SC70-5", Case/Package=SC, High Level Output Current=32mA, Max Operating Temperature=125°C, Max Supply Voltage=5.5V, Min Operating Temperature=-40°C, Min Supply Voltage=1.65V, Nominal Supply Current=40mA, Package Quantity=1, Quiescent Current=10uA, Contact Plating=Gold, Lead Free="Lead Free", Logic Function=Buffer, Low Level Output Current=32mA, Mount="Surface Mount", Number of Bits=1, Number of Bits per Element=1, Number Of Channels=1, Number of Circuits=1, Number of Elements=1, Number of Gates=1, Number of Input Lines=1, Number of Inputs=1, Number of Output Lines=1, Number Of Outputs=1, Number of Pins=5, Packaging="Tape and Reel", Polarity=Non-Inverting, Propagation Delay=8.3ns, Radiation Hardening=No, REACH SVHC="No SVHC", Termination=SMD/SMT, Turn-On Delay Time=8.3ns
U? U?: library part CMP-05698-000018-1, "IC AMP CLASS D MONO 3.2W 16TQFN", Max Operating Temperature=85°C, Max Output Current=1.6A, Max Output Power=3.2W, Max Power Dissipation=1.666W, Max Supply Voltage=5.5V, Min Operating Temperature=-40°C, Min Supply Voltage=2.5V, Power Supply Rejection Ratio (PSRR)=77dB, Voltage Gain=15dB, Contact Plating=Tin, Mount="Surface Mount", Number of Pins=16, Packaging="Tape and Reel", Radiation Hardening=No, RoHS Compliant=Yes, Series=-
U? U? U?_FAN_IF_0 U?_FAN_IF_1: library part CMP-019-00043-2, "Power Supply Support Circuit, Adjustable, 1 Channel, PDSO6", Case/Package=TSSOP, Max Supply Voltage=20V, Min Supply Voltage=1.8V, Pins=6, RoHS Compliant=Yes
U?_FAN_IF_0 U?_FAN_IF_1: library part CMP-0244-00204-1, "Positive Voltage Regulator, 12V, 3-Pin DPAK, Tape and Reel", ComponentLink1Description="Manufacturer URL", ComponentLink1URL=http://www.st.com, ComponentLink2Description=Datasheet, ComponentLink2URL=http://www.st.com/internet/com/TECHNICAL_RESOURCES/TECHNICAL_LITERATURE/DATASHEET/CD00000447.pdf, DatasheetVersion=1/11/2010, PackageDescription="3-Pin Transistor Outline Package 2.28 mm Pitch, 9.7 mm Lead Span (DPAK)", PackageReference=TO-252, PackageVersion=2011
Y1_DES_0 Y1_DES_1 Y1_DES_2 Y2_SER_0 Y2_SER_1: library part CMP-2000-05733-3, "Crystal 25MHz ±20ppm (Tol) ±30ppm (Stability) 18pF FUND 60Ω 4-Pin SMD T/R", Case/Package=CSMD, ESR (Equivalent Series Resistance)=60R, Frequency=25MHz, Frequency Stability=30ppm, Frequency Tolerance=20ppm, Load Capacitance=18pF, Max Operating Temperature=85°C, Min Operating Temperature=-40°C, Operating Frequency="25 MHz", Package Quantity=1000, Depth=2.5mm, Height=0.039inch, Lead Free="Lead Free", Length=3.2mm, Mount="Surface Mount", Number of Pins=4, Packaging="Tape and Reel", Radiation Hardening=No, Series=ABM8G, Series Resistance=60R, Termination=SMD/SMT, Tolerance=20ppm, Width=0.098inch
Y?: library part CMP-27762-001115-1, "XTAL OSC XO 32.7680KHZ CMOS SMD", Case/Package=CSMD, Frequency=32.768kHz, Frequency Stability=25ppm, Load Capacitance=15pF, Max Operating Temperature=85°C, Max Supply Current=3.5mA, Min Operating Temperature=-40°C, Min Supply Voltage=2.97V, Operating Supply Voltage=3.3V, Depth=2mm, Height=0.037inch, Lead Free="Lead Free", Length=2.5mm, Mount="Surface Mount", Number of Pins=4, Packaging="Tape and Reel", Radiation Hardening=No, Series=ASDK, Termination=SMD/SMT, Width=0.079inch

## Via types
v1: diameter 0.5, hole 0.2, Top Layer to Bottom Layer, 66 vias
v2: diameter 0.5, hole 0.3, Top Layer to Bottom Layer, 12 vias
v3: diameter 0.75, hole 0.5, Top Layer to Bottom Layer, 2 vias

## Nets (pads, with @x,y where several pads share a name; then routed paths per layer and width w, separated by ;. In a path a pad name is that pad's centre, name@x,y a point inside that pad or via, vN(x,y) a via of type N, cw(c..) or ccw(c..) an arc to the next point about the centre after c; other vN are vias at no path point)
1V2: R22_SER_0.1 R22_SER_1.1
1V8: R21_SER_0.1 R21_SER_1.1
1V8_CAM0_PWDN: J?.114@136.728,-875.956 R?.1@-34.997,-842.081
1V8_CAM1_PWDN: J?.120@136.728,-877.456 R?.1@-29.997,-842.081
1V8_SMB_nALERT: R?.1@147.978,-760.081 U?.2@174.858,-760.081
1V8_SPI1_MISO: D?.4@114.211,-761.581 D?.7@115.046,-761.581 J?.108@136.728,-874.456 Q?.2@-10.322,-761.731 R?.1@9.978,-760.081
1V8_SPI1_MOSI: D?.1@114.211,-760.081 D?.10@115.046,-760.081 J?.104@136.728,-873.456 Q?.2@35.678,-761.731 R?.1@43.978,-760.081
1V8_SPI1_nCS_0: D?.5@114.211,-762.081 D?.6@115.046,-762.081 J?.110@136.728,-874.956 Q?.2@-36.322,-761.731 R?.1@-28.022,-760.081
1V8_SPI1_nCS_1: J?.112@136.728,-875.456 Q?.2@-54.322,-761.731 R?.1@-45.022,-760.081
1V8_SPI1_SCLK: D?.2@114.211,-760.581 D?.9@115.046,-760.581 J?.106@136.728,-873.956 Q?.2@18.678,-761.731 R?.1@26.978,-760.081
5V_MAIN: J?.251@212.528,-912.206 J?.252@247.728,-912.456 J?.253@212.528,-912.706 J?.254@247.728,-912.956 J?.255@212.528,-913.206 J?.256@247.728,-913.456 J?.257@212.528,-913.706 J?.258@247.728,-913.956 J?.259@212.528,-914.206 J?.260@247.728,-914.456 R?.1@-53.997,-731.081 R?.2@24.278,-842.081 R?.2@41.278,-842.081 R?_RAIL_DISCH_0.2@-6.372,-599.355 R?_RAIL_DISCH_1.2@-7.372,-584.355 R?_RAIL_DISCH_2.2@-6.372,-569.355
ACT_LED: J?.10@141.278,-724.081 R?.1@33.128,-706.081
AUD_GND: C?.2@82.528,-933.081 C?.2@-26.472,-933.081 J?.1@55.678,-946.381 J?.5@26.178,-942.081 R?.1@-14.122,-933.081 R?.2@1.378,-933.081 R?.2@106.378,-933.081
CAM0_PWDN: Q?.6@-42.422,-842.431
CAM1_PWDN: Q?.3@-39.322,-843.731
CAM_I2C_SCL: D?.4@144.211,-761.581 D?.7@145.046,-761.581 J?.213@156.528,-902.706
CAM_I2C_SDA: D?.5@144.211,-762.081 D?.6@145.046,-762.081 J?.215@156.528,-903.206
CAN_RX: D?.1@101.211,-760.081 D?.10@102.046,-760.081 J?.143@100.528,-883.206
CAN_TX: D?.2@101.211,-760.581 D?.9@102.046,-760.581 J?.145@100.528,-885.706
CFG0_DES_0: R6_DES_0.1 R8_DES_0.2 U1_DES_0.4
CFG0_DES_1: R6_DES_1.1 R8_DES_1.2 U1_DES_1.4
CFG0_DES_2: R6_DES_2.1 R8_DES_2.2 U1_DES_2.4 | length 5.6
  Bottom Layer w0.2: R6_DES_2.1@47.46,32.54 R8_DES_2.2@48.46,33.54 ; R8_DES_2.2@48.513,33.593 49.407,33.593 50.4,32.6 51.425,32.6 U1_DES_2.4@52.023,32.003
CFG0_SER_0: R25_SER_0.1 R27_SER_0.2 U4_SER_0.3
CFG0_SER_1: R25_SER_1.1 R27_SER_1.2 U4_SER_1.3
CFG1_SER_0: R26_SER_0.1 R28_SER_0.2 U4_SER_0.4
CFG1_SER_1: R26_SER_1.1 R28_SER_1.2 U4_SER_1.4
CKA_DES_0_N: U1_DES_0.40
CKA_DES_0_P: U1_DES_0.39
CKA_DES_1_N: U1_DES_1.40
CKA_DES_1_P: U1_DES_1.39
CKA_DES_2_N: U1_DES_2.40
CKA_DES_2_P: U1_DES_2.39
CKB_DES_0_N: C48_SER_0.2 U1_DES_0.46
CKB_DES_0_P: C47_SER_0.2 U1_DES_0.45
CKB_DES_1_N: C48_SER_1.2 U1_DES_1.46
CKB_DES_1_P: C47_SER_1.2 U1_DES_1.45
CKB_DES_2_N: U1_DES_2.46
CKB_DES_2_P: U1_DES_2.45
CLK_SER_0_N: C48_SER_0.1 U4_SER_0.28
CLK_SER_0_P: C47_SER_0.1 U4_SER_0.27
CLK_SER_1_N: C48_SER_1.1 U4_SER_1.28
CLK_SER_1_P: C47_SER_1.1 U4_SER_1.27
CONF_SCL_DES_0: U1_DES_0.29
CONF_SCL_DES_1: U1_DES_1.29
CONF_SCL_DES_2: U1_DES_2.29 | length 1.1
  Bottom Layer w0.2: U1_DES_2.29@61.038,30.058 61.295,29.801 61.949,29.801 v2(62,29.75)
CONF_SCL_SER_0: R19_SER_0.1 U4_SER_0.6
CONF_SCL_SER_1: R19_SER_1.1 U4_SER_1.6
CONF_SDA_DES_0: U1_DES_0.28
CONF_SDA_DES_1: U1_DES_1.28
CONF_SDA_DES_2: U1_DES_2.28 | length 1
  Bottom Layer w0.2: U1_DES_2.28@61.038,30.942 61.157,31.061 61.189,31.061 v2(61.75,30.5)
CONF_SDA_SER_0: R18_SER_0.1 U4_SER_0.5
CONF_SDA_SER_1: R18_SER_1.1 U4_SER_1.5
CSI0_CLK_N: D?.2@188.211,-760.581 D?.9@189.046,-760.581 J?.10@80.728,-849.956
CSI0_CLK_P: D?.1@188.211,-760.081 D?.10@189.046,-760.081 J?.12@80.728,-850.456
CSI0_D0_N: D?.5@188.211,-762.081 D?.6@189.046,-762.081 J?.4@80.728,-848.456
CSI0_D0_P: D?.4@188.211,-761.581 D?.7@189.046,-761.581 J?.6@80.728,-848.956
CSI0_D1_N: R?.2@2.128,-842.081
CSI0_D1_P: R?.2@-1.872,-842.081
CSI1_D0_N: R?.2@-6.872,-842.081
CSI1_D0_P: R?.2@-10.872,-842.081
CSI1_D1_N: D?.4@192.211,-761.581 D?.7@193.046,-761.581 J?.15@44.528,-851.206
CSI1_D1_P: D?.5@192.211,-762.081 D?.6@193.046,-762.081 J?.17@44.528,-851.706
CSI2_CLK_N: D?.1@135.211,-760.081 D?.10@136.046,-760.081 J?.28@80.728,-854.456
CSI2_CLK_P: D?.2@135.211,-760.581 D?.9@136.046,-760.581 J?.30@80.728,-854.956
CSI2_D0_N: D?.4@157.211,-761.581 D?.7@158.046,-761.581 J?.22@80.728,-852.956
CSI2_D0_P: D?.5@157.211,-762.081 D?.6@158.046,-762.081 J?.24@80.728,-853.456
CSI2_D1_N: D?.4@135.211,-761.581 D?.7@136.046,-761.581 J?.34@80.728,-855.956
CSI2_D1_P: D?.5@135.211,-762.081 D?.6@136.046,-762.081 J?.36@80.728,-856.456
CSI3_D0_N: D?.1@161.211,-760.081 D?.10@162.046,-760.081 J?.21@44.528,-852.706
CSI3_D0_P: D?.2@161.211,-760.581 D?.9@162.046,-760.581 J?.23@44.528,-853.206
CSI3_D1_N: D?.4@161.211,-761.581 D?.7@162.046,-761.581 J?.33@44.528,-855.706
CSI3_D1_P: D?.5@161.211,-762.081 D?.6@162.046,-762.081 J?.35@44.528,-856.206
DA0_DES_0_N: U1_DES_0.32
DA0_DES_0_P: U1_DES_0.31
DA0_DES_1_N: U1_DES_1.32
DA0_DES_1_P: U1_DES_1.31
DA0_DES_2_N: U1_DES_2.32
DA0_DES_2_P: U1_DES_2.31
DA0_SER_0_N: C37_SER_0.1 U4_SER_0.26
DA0_SER_0_P: C35_SER_0.1 U4_SER_0.25
DA0_SER_1_N: C37_SER_1.1 U4_SER_1.26
DA0_SER_1_P: C35_SER_1.1 U4_SER_1.25
DA1_DES_0_N: U1_DES_0.36
DA1_DES_0_P: U1_DES_0.35
DA1_DES_1_N: U1_DES_1.36
DA1_DES_1_P: U1_DES_1.35
DA1_DES_2_N: U1_DES_2.36
DA1_DES_2_P: U1_DES_2.35
DA1_SER_0_N: C39_SER_0.1 U4_SER_0.30
DA1_SER_0_P: C38_SER_0.1 U4_SER_0.29
DA1_SER_1_N: C39_SER_1.1 U4_SER_1.30
DA1_SER_1_P: C38_SER_1.1 U4_SER_1.29
DA2_DES_0_N: U1_DES_0.38
DA2_DES_0_P: U1_DES_0.37
DA2_DES_1_N: U1_DES_1.38
DA2_DES_1_P: U1_DES_1.37
DA2_DES_2_N: U1_DES_2.38
DA2_DES_2_P: U1_DES_2.37
DA2_SER_0_N: C42_SER_0.1 U4_SER_0.20
DA2_SER_0_P: C41_SER_0.1 U4_SER_0.19
DA2_SER_1_N: C42_SER_1.1 U4_SER_1.20
DA2_SER_1_P: C41_SER_1.1 U4_SER_1.19
DA3_DES_0_N: U1_DES_0.42
DA3_DES_0_P: U1_DES_0.41
DA3_DES_1_N: U1_DES_1.42
DA3_DES_1_P: U1_DES_1.41
DA3_DES_2_N: U1_DES_2.42
DA3_DES_2_P: U1_DES_2.41
DA3_SER_0_N: C46_SER_0.1 U4_SER_0.24
DA3_SER_0_P: C43_SER_0.1 U4_SER_0.23
DA3_SER_1_N: C46_SER_1.1 U4_SER_1.24
DA3_SER_1_P: C43_SER_1.1 U4_SER_1.23
DAC_BCK: TP?.1@139.628,-932.081 U?.16
DAC_DIN: TP?.1@127.628,-932.081 U?.1@18.203,-933.331 U?.1@122.203,-933.331
DAC_LRCK: TP?.1@133.628,-932.081 U?.14
DB0_DES_0_N: C37_SER_0.2 U1_DES_0.44
DB0_DES_0_P: C35_SER_0.2 U1_DES_0.43
DB0_DES_1_N: C37_SER_1.2 U1_DES_1.44
DB0_DES_1_P: C35_SER_1.2 U1_DES_1.43
DB0_DES_2_N: U1_DES_2.44
DB0_DES_2_P: U1_DES_2.43
DB1_DES_0_N: C39_SER_0.2 U1_DES_0.48
DB1_DES_0_P: C38_SER_0.2 U1_DES_0.47
DB1_DES_1_N: C39_SER_1.2 U1_DES_1.48
DB1_DES_1_P: C38_SER_1.2 U1_DES_1.47
DB1_DES_2_N: U1_DES_2.48
DB1_DES_2_P: U1_DES_2.47
DB2_DES_0_N: C42_SER_0.2 U1_DES_0.50
DB2_DES_0_P: C41_SER_0.2 U1_DES_0.49
DB2_DES_1_N: C42_SER_1.2 U1_DES_1.50
DB2_DES_1_P: C41_SER_1.2 U1_DES_1.49
DB2_DES_2_N: U1_DES_2.50
DB2_DES_2_P: U1_DES_2.49
DB3_DES_0_N: C46_SER_0.2 U1_DES_0.54
DB3_DES_0_P: C43_SER_0.2 U1_DES_0.53
DB3_DES_1_N: C46_SER_1.2 U1_DES_1.54
DB3_DES_1_P: C43_SER_1.2 U1_DES_1.53
DB3_DES_2_N: U1_DES_2.54
DB3_DES_2_P: U1_DES_2.53
DEBUG_RXD: R?.2@32.253,-842.081
DEBUG_TXD: R?.2@15.253,-842.081
DES_1V2_DES_0: C14_DES_0.1 C19_DES_0.2 C20_DES_0.2 C21_DES_0.2 C22_DES_0.2 C29_DES_0.2 C30_DES_0.2 R11_DES_0.2 U1_DES_0.30 U1_DES_0.55 U1_DES_0.56 U3_DES_0.2 U3_DES_0.4
DES_1V2_DES_1: C14_DES_1.1 C19_DES_1.2 C20_DES_1.2 C21_DES_1.2 C22_DES_1.2 C29_DES_1.2 C30_DES_1.2 R11_DES_1.2 U1_DES_1.30 U1_DES_1.55 U1_DES_1.56 U3_DES_1.2 U3_DES_1.4
DES_1V2_DES_2: C14_DES_2.1 C19_DES_2.2 C20_DES_2.2 C21_DES_2.2 C22_DES_2.2 C29_DES_2.2 C30_DES_2.2 R11_DES_2.2 U1_DES_2.30 U1_DES_2.55 U1_DES_2.56 U3_DES_2.2 U3_DES_2.4 | length 15.3
  Top Layer w0.3: C22_DES_2.2@49.162,32.662 C21_DES_2.2@50.162,31.662 ; C30_DES_2.2@63.338,30.162 C29_DES_2.2@64.338,31.162
  Bottom Layer w0.3: v2(48.5,32) 48.5,31 50.25,29.25 50.861,29.25 U1_DES_2.55@51.315,29.705 ; v2(49,32.5) 49,31 50.278,29.722 50.626,29.722 U1_DES_2.56@50.962,30.058 ; U1_DES_2.30@60.685,29.705 61.389,29 62.683,29 v2(63.591,29.909)
DES_1V8_DES_0: C12_DES_0.1 C23_DES_0.2 C24_DES_0.2 C25_DES_0.2 C26_DES_0.2 U1_DES_0.7 U1_DES_0.21 U2_DES_0.2 U2_DES_0.4
DES_1V8_DES_1: C12_DES_1.1 C23_DES_1.2 C24_DES_1.2 C25_DES_1.2 C26_DES_1.2 U1_DES_1.7 U1_DES_1.21 U2_DES_1.2 U2_DES_1.4
DES_1V8_DES_2: C12_DES_2.1 C23_DES_2.2 C24_DES_2.2 C25_DES_2.2 C26_DES_2.2 U1_DES_2.7 U1_DES_2.21 U2_DES_2.2 U2_DES_2.4 | length 8.2
  Top Layer w0.3: v2(51.5,35) 51.538,34.962 51.538,34.639 C23_DES_2.2@52.338,33.838 ; C25_DES_2.2@59.662,33.838 60.462,34.639 60.462,34.962 v2(60.5,35)
  Bottom Layer w0.3: v2(51.5,35) 51.538,34.962 51.538,34.608 U1_DES_2.7@53.083,33.063 ; U1_DES_2.21@58.563,33.417 59.896,34.75 60.224,34.75 60.474,35 v2(60.5,35)
DP1_AUX_N: D?.4@139.211,-761.581 D?.7@140.046,-761.581 J?.98@136.728,-871.956
DP1_AUX_P: Q?.2@175.678,-925.731 R?.1@184.978,-924.081
DP1_HPD: D?.2@139.211,-760.581 D?.9@140.046,-760.581 J?.96@136.728,-871.456
DP1_TXD0_N: D?.1@196.211,-760.081 D?.10@197.046,-760.081 J?.63@44.528,-863.206
DP1_TXD0_P: D?.2@196.211,-760.581 D?.9@197.046,-760.581 J?.65@44.528,-863.706
DP1_TXD1_N: D?.4@196.211,-761.581 D?.7@197.046,-761.581 J?.69@44.528,-864.706